# Altium PCB machin.PcbDoc
Units mil, origin at the board's own origin, x right, y up, seen from the top; angles counter-clockwise.
Board outline 6000 x 4000 mil, 2 copper layers (Top Layer, Bottom Layer); 33 components, 42 nets, 316 pads, 11 vias.
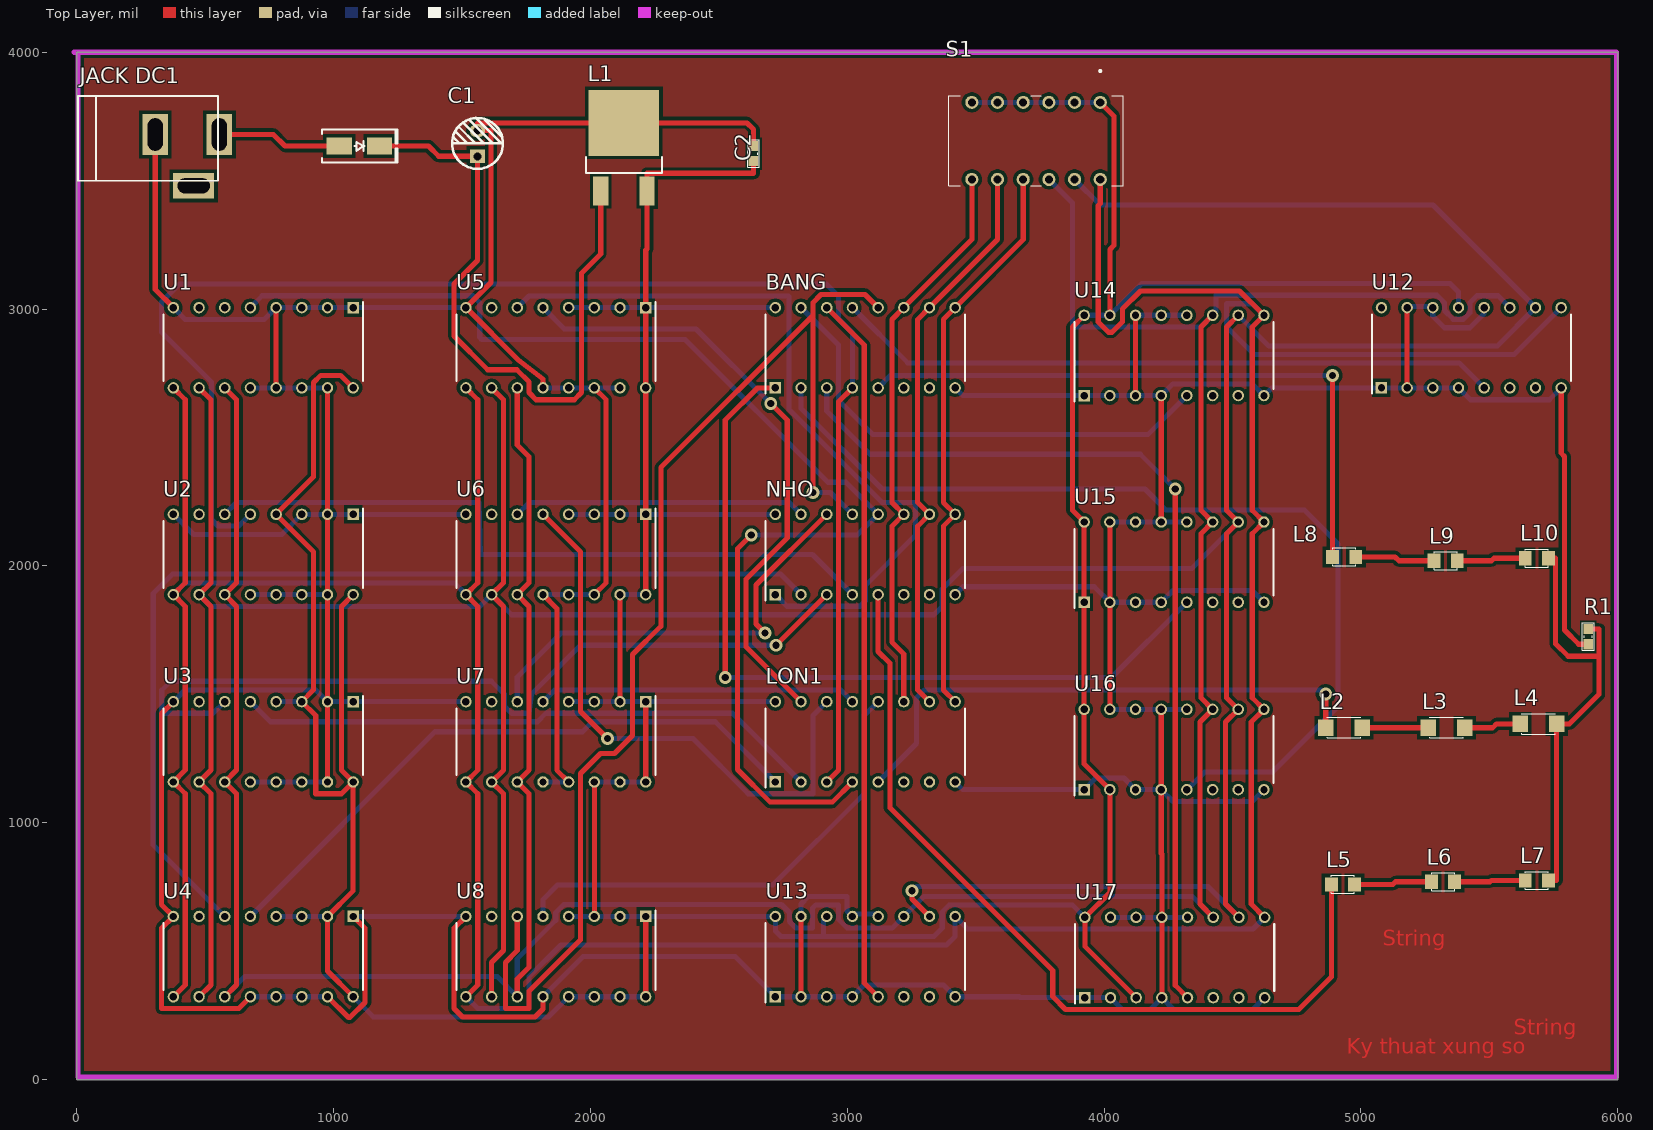
[diagram p0: Top Layer view]
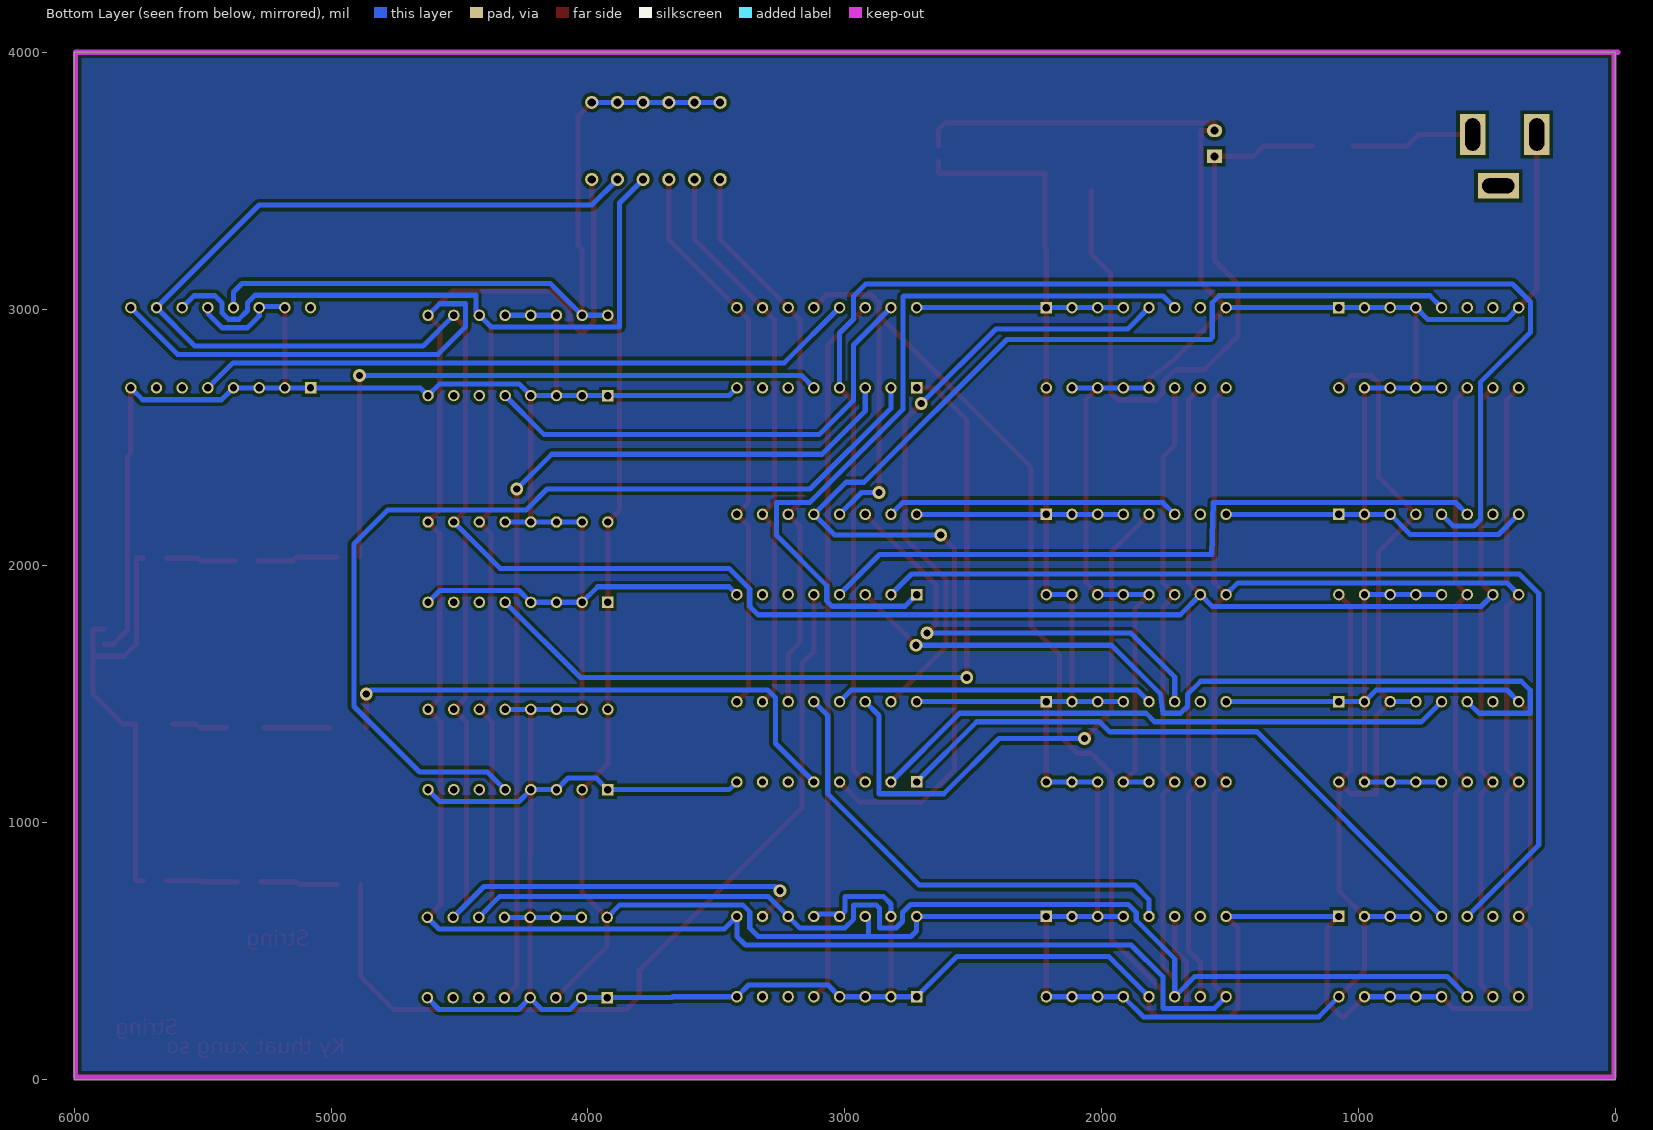
[diagram p1: Bottom Layer view, seen from below]
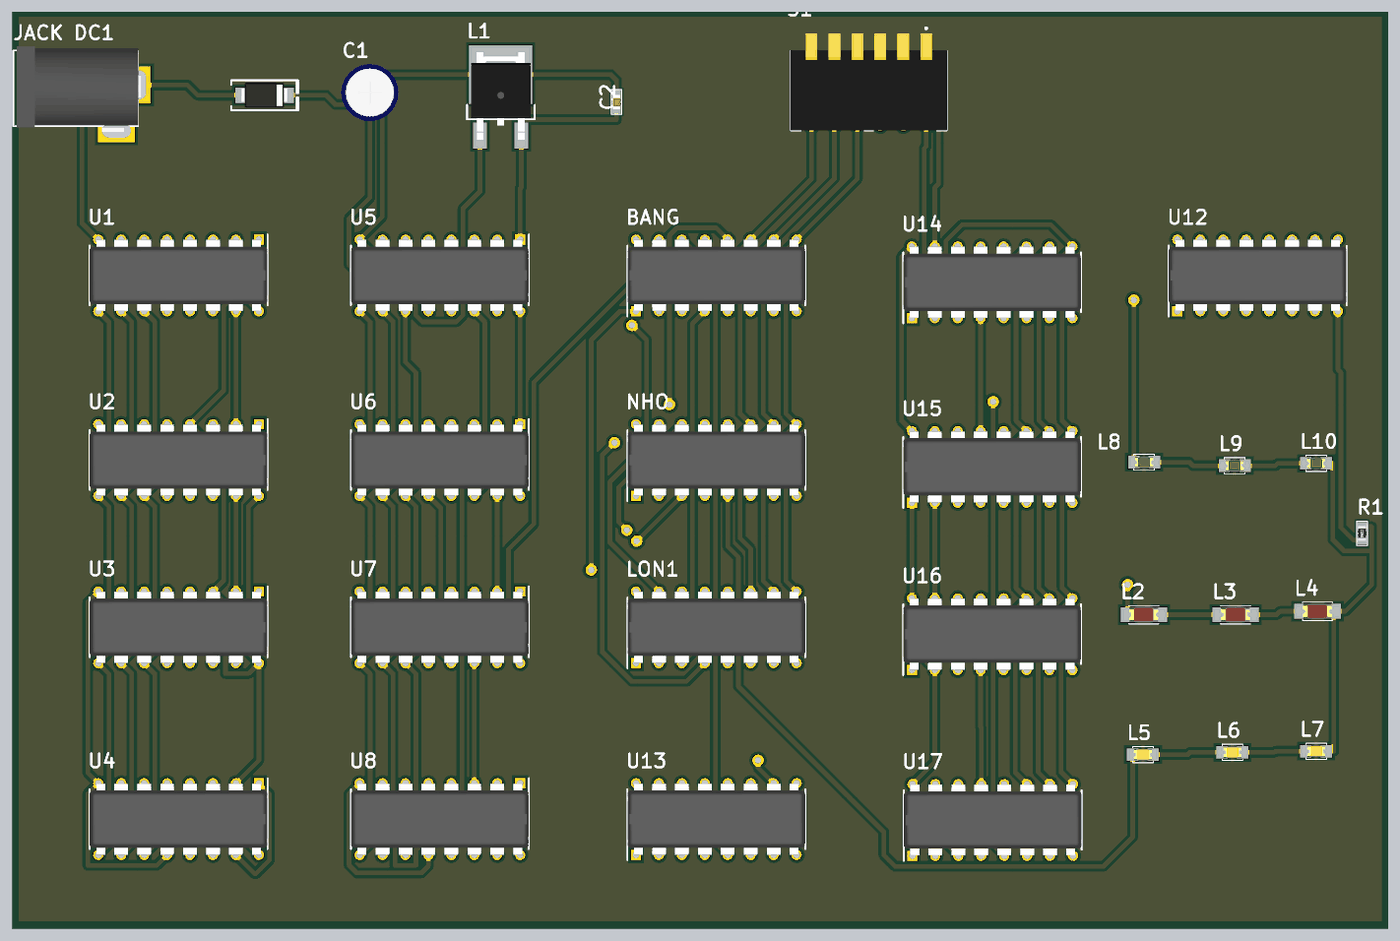
[diagram p2: 3D render of the assembled board from above, using the file's embedded part models]

## Layer stack, top to bottom
Top Solder: solder mask 0.4, Solder Resist, Dk 3.5
Top Layer: signal copper 1.4
Dielectric 1: dielectric 12.6, FR-4, Dk 4.8
Bottom Layer: signal copper 1.4
Bottom Solder: solder mask 0.4, Solder Resist, Dk 3.5

## Board outline
0,0 6000,0 6000,4000 0,4000

## Design rules (kind name [scope] priority, off if disabled: settings)
Clearance [All] p1: gap=13 ignorepadtopadclearanceinfootprint=FALSE
PolygonConnect [All] p1: connectstyle=Direct reliefconductorwidth=10 reliefentries=4 polygonreliefangle="90 Angle" airgapwidth=10
RoutingVias [All] p1: holewidth=28 width=50 viastyle="Through Hole" minholewidth=28 minwidth=50 maxholewidth=28 maxwidth=50
SolderMaskExpansion [All] p1: expansion=4 istentingtop=FALSE
Width [All] p1: maxlimit=40 minlimit=13 preferedwidth=20
30 further rules are at their usual default settings.

## Classes and differential pairs
component class Main_logiv: BANG LON1 NHO U1 U2 U3 U4 U5 U6 U7 U8 U12 U13 U14 U15 U16 U17

## Components (designator, comment, footprint, x,y, rotation, side; value= is the part's Value field where it differs from the comment)
BANG "SN74HC151N" DIP794W53P254L1930H508Q16N 3070,2849.53 r90 top
C1 "0.33uF" "tu hoa 5mm" 1560,3645 r90 top
C2 "101" "tu 0603" 2635,3605.47 r90 top
"JACK DC1" "JACK DC 5.5" "JACK DC 5.5" 430,3580 r0 top value="Jac DC"
L1 "L7805CDT-TR" DPAK_118_446_112X59_SMD 2125,3617.64 r90 top
L2 "LED 0805" LED-1206-Red 4863,1370 r0 top
L3 "LED 0805" LED-1206-Red 5263,1370 r0 top
L4 "LED 0805" LED-1206-Red 5620,1385 r0 top
L5 "LED 0805" LED-0805-Yellow 4885,760 r0 top
L6 "LED 0805" LED-0805-Yellow 5275,770 r0 top
L7 "LED 0805" LED-0805-Yellow 5640,775 r0 top
L8 "LED 0805" LED-0805-Green 4890,2035 r0 top
L9 "LED 0805" LED-0805-Green 5285,2020 r0 top
L10 "LED 0805" LED-0805-Green 5640,2030 r0 top
LON1 "SN74HC151N" DIP794W53P254L1930H508Q16N 3070,1315 r90 top
NHO "SN74HC151N" DIP794W53P254L1930H508Q16N 3070,2044.53 r90 top
R1 "10k" "tro smd 0603" 5885,1724.53 r90 top
S1 "A6DR-6100" A6DR6100 3985,3805 r180 top
U1 "SN74HC151N" DIP794W53P254L1930H508Q16N 725.87,2849.53 r270 top
U2 "SN74HC151N" DIP794W53P254L1930H508Q16N 725.87,2044.53 r270 top
U3 "SN74HC151N" DIP794W53P254L1930H508Q16N 725.87,1315 r270 top
U4 "SN74HC151N" DIP794W53P254L1930H508Q16N 725.87,478.7 r270 top
U5 "SN74HC151N" DIP794W53P254L1930H508Q16N 1865,2849.53 r270 top
U6 "SN74HC151N" DIP794W53P254L1930H508Q16N 1865,2044.53 r270 top
U7 "SN74HC151N" DIP794W53P254L1930H508Q16N 1865,1315 r270 top
U8 "SN74HC151N" DIP794W53P254L1930H508Q16N 1865,478.7 r270 top
U12 "SN74HC151N" DIP794W53P254L1930H508Q16N 5430,2849.53 r90 top
U13 "SN74HC151N" DIP794W53P254L1930H508Q16N 3070,478.7 r90 top
U14 "SN74HC151N" DIP794W53P254L1930H508Q16N 4272.46,2819.53 r90 top
U15 "SN74HC151N" DIP794W53P254L1930H508Q16N 4272.46,2014.53 r90 top
U16 "SN74HC151N" DIP794W53P254L1930H508Q16N 4272.46,1285 r90 top
U17 "SN74HC151N" DIP794W53P254L1930H508Q16N 4275,475 r90 top
? "M7" "DIODE SMA" 1100,3635 r0 top

## Footprints (in the part's own frame and the unit in brackets; to place one, negate y for a bottom-side part, rotate by r counter-clockwise, add the part's x,y. Pads: shape width x height; smd on the part's side, far side on the other; paste and mask are expansions set on the pad)
A6DR6100 [mm]
  round 1.3 hole 0.8: A1(0,0) A2(2.54,0) A3(5.08,0) A4(7.62,0) A5(10.16,0) A6(12.7,0) B1(0,7.62) B2(2.54,7.62) B3(5.08,7.62) B4(7.62,7.62) B5(10.16,7.62) B6(12.7,7.62)
  silkscreen extent -2.3,-3.2 15,8.26, body extent -2.3,-2.52 15,8.23, height 7.52
"DIODE SMA" [mm] "SMA"
  rect 2.5x1.7 smd: 1(-2,0) 2(2,0)
  silkscreen extent -3.68,-1.65 3.75,1.65, body extent -2.6,-1.37 2.6,1.37, height 2.4
DIP794W53P254L1930H508Q16N [mm]
  rect 1.13x1.13 hole 0.73: 1(-3.97,8.89)
  round 1.13 hole 0.73: 2(-3.97,6.35) 3(-3.97,3.81) 4(-3.97,1.27) 5(-3.97,-1.27) 6(-3.97,-3.81) 7(-3.97,-6.35) 8(-3.97,-8.89) 9(3.97,-8.89) 10(3.97,-6.35) 11(3.97,-3.81) 12(3.97,-1.27) 13(3.97,1.27) 14(3.97,3.81) 15(3.97,6.35) 16(3.97,8.89)
  silkscreen extent -4.54,-9.84 3.3,9.84, body extent -3.94,-9.84 3.94,9.84, height 5.09
DPAK_118_446_112X59_SMD [mm] "CASE: DPAK"
  rect 2.85x1.5 smd: 1(-4.023,2.163) 3(-4.023,-2.417)
  rect 6.5x7 smd: 2(2.727,-0.127)
  silkscreen extent -2.22,-3.9 -0.62,3.6, body extent -4.47,-3.43 5.23,3.15, height 2.3
"JACK DC 5.5" [mil] "Jac DC input"
  rect 100x160 hole 59.06 slot 125.98 at 90 deg: 1(125,100) 2(-125,100)
  rect 160x100 hole 59.06 slot 125.98 at 0 deg: 3(25,-100)
  silkscreen extent -425,-80 120,250, body extent -410,-105 134,269, height 434
LED-0805-Green [mil]
  rect 50x55 smd: 1(0,0) 2(90,0)
  silkscreen extent 0,-35 90,35, body extent 5,-25 85,25, height 43
LED-0805-Yellow [mil]
  rect 50x55 smd: 1(0,0) 2(90,0)
  silkscreen extent 0,-35 90,35, body extent 5,-25 85,25, height 43
LED-1206-Red [mil]
  rect 60x65 smd: 1(0,0) 2(142,0)
  silkscreen extent 6,-40 136,40, body extent 7,-31 133,32, height 43
"tro smd 0603" [mm] "Chip Capacitor, 2-Leads, Body 1,60x0,80mm, IPC Medium Density"
  rect 1x0.95 smd mask+0.076: 1(-0.75,0) 2(0.75,0)
  silkscreen extent -1.35,-0.58 1.37,0.58, body extent -0.82,-0.42 0.82,0.43, height 0.44
"tu 0603" [mm] "Chip Capacitor, 2-Leads, Body 1,60x0,80mm, IPC Medium Density"
  rect 1x0.95 smd mask+0.076: 1(-0.75,0) 2(0.75,0)
  silkscreen extent -1.35,-0.58 1.37,0.58, body extent -0.8,-0.4 0.8,0.4, height 0.9
"tu hoa 5mm" [mm]
  rect 1.3x1.5 hole 0.8: 1(-1.27,0)
  oval 1.3x1.5 hole 0.8: 2(1.27,0)
  silkscreen extent -2.51,-2.51 2.51,2.51, body extent -3.12,-3.18 3.23,3.18, height 14.55

## Part data
BANG LON1 NHO U1 U2 U3 U4 U5 U6 U7 U8 U12 U13 U14 U15 U16 U17: "Integrated Circuit", Manufacturer_Name="Texas Instruments", Mouser Part Number=595-SN74HC151N, Datasheet Link=https://www.ti.com/lit/gpn/SN74HC151, Height=5.08mm, Manufacturer_Part_Number=SN74HC151N, Mouser Price/Stock=https://www.mouser.co.uk/ProductDetail/Texas-Instruments/SN74HC151N?qs=st7IWvlL5%2FgZ0EYsqHF4AQ%3D%3D
C1: library part "Tu Hoa 0.33uF 50V 5x11", "Cắm", Chung_Loai=Cắm, Don_Vi=Con, Ma_Hang=MH004655, So_Chan=2, Ten_Linh_Kien="Tụ Hóa 0.33uF 50V 5x11MM"
C2: library part "Tu 0603 101 50V 10%", "Dán", Chung_Loai=Dán, Don_Vi=Con, Ma_Hang=MH004565, So_Chan=2, Ten_Linh_Kien="Tụ 0603 101-0.1nF 10% 50V"
L1: library part REG_35V_5V-1.5A-7.5W-DPAK, "Linear Voltage Regulator IC 1 Output 1.5A DPAK", Alternate Part Number-1="CJ7805 3%", Case/Package=DPAK, Manufacturer=Diodes, Manufacturer Part Number=L7805CDT-TR, Supplier Part Number-1=L7805CDT-TR, Supplier-1="SP ROAD"
L2 L3 L4: library part "LED 1206 Do", "Dán", Chung_Loai=Dán, Don_Vi=Con, Ma_Hang=MH002334, Ten_Linh_Kien="LED1206 Màu Đỏ (Red)"
L5 L6 L7: library part "LED 0805 Vang", "Dán", Chung_Loai=Dán, Don_Vi=Con, Ma_Hang=MH002329, Ten_Linh_Kien="LED 0805 Màu Vàng ( Yellow)"
L8 L9 L10: library part "LED 0805 Xanh La", "Dán", Chung_Loai=Dán, Don_Vi=Con, Ma_Hang=MH002326, Ten_Linh_Kien="LED 0805 Màu Xanh Lá (Green)"
R1: library part "Tro 0603 5% 10k", "Dán", Chung_Loai=Dán, Don_Vi=Con, Ma_Hang=MH006316, So_Chan=2, Ten_Linh_Kien="Trở 0603 5% 10k"
S1: "Switch", Manufacturer_Name="OMRON Electronics", Mouser Part Number=653-A6DR-6100, Datasheet Link=https://componentsearchengine.com/Datasheets/2/A6DR-6100.pdf, Height=7.4mm, Manufacturer_Part_Number=A6DR-6100, Mouser Price/Stock=https://www.mouser.co.uk/ProductDetail/Omron-Electronics/A6DR-6100?qs=Pjd0UV7BHP9H24KYn64LLg%3D%3D
?: library part "Diode M7 ( 4007 )", "Dán", Chung_Loai=Dán, Don_Vi=Con, Ma_Hang=MH000944, Ten_Linh_Kien="Diode M7 1N4007 SMD 1A 1000V"

## Via types
v1: diameter 50, hole 28, Top Layer to Bottom Layer, 11 vias

## Nets (pads, with @x,y where several pads share a name; then routed paths per layer and width w, separated by ;. In a path a pad name is that pad's centre, name@x,y a point inside that pad or via, vN(x,y) a via of type N, cw(c..) or ccw(c..) an arc to the next point about the centre after c; other vN are vias at no path point)
A0: S1.B1 U1.9 U2.9 U3.9 U4.9 U5.9 U6.9 U7.9 U8.9 U12.9 U13.9 U14.9 U15.9 U16.9 U17.9 | length 15075.5
  Top Layer w20: U4.9 422,368.54 422,1112.57 U3.9 422,1204.83 422,1842.1 U2.9 422,1934.36 422,2647.1 U1.9 ; U8.9 1561,368.4 1561,1112.7 U7.9 1561,1204.7 1561,1842.23 U6.9 1561,1934.23 1561,2647.23 U5.9 ; S1.B1 3985,3412 3977,3404 3977,2950 4017,2910 4031,2910 4071,2950 4071,3000 4142,3071 4527.29,3071 U14.9 4577,2930.37 4577,2216.29 U15.9 4577,2125.37 4577,1486.76 U16.9 4573,1391.84 4573,683.3 U17.9
  Bottom Layer w20: U2.9 421.64,1934 1469.23,1934 U6.9 ; U8.9 1560.25,277.16 1760,277.16 1761,278.16 1761,400 1884.75,523.75 3386.75,523.75 3420,557 U13.9 3469,586 4579.7,586 U17.9 ; U14.9 4577.22,3021.08 4477,3021.08 4477,2931 4584.21,2823.79 5597.96,2823.79 U12.9
A1: S1.B2 U1.10 U2.10 U3.10 U4.10 U5.10 U6.10 U7.10 U8.10 U12.10 U13.10 U14.10 U15.10 U16.10 U17.10 | length 16467.7
  Top Layer w20: U4.10 522,368.54 522,1112.57 U3.10 522,1204.83 522,1842.1 U2.10 522,1934.36 522,2647.1 U1.10 ; U8.10 1615,456 1661,502 1661,1112.7 U7.10 1661,1204.7 1661,1842.23 U6.10 1661,1934.23 1661,2647.23 U5.10 ; v1(3252,735) 3252,703 U13.10 ; U14.10 4477,2930.37 4477,2216.29 U15.10 4477,2125.37 4477,1486.76 U16.10 4473,1391.84 4473,683.3 U17.10
  Bottom Layer w20: U2.10 522.1,1842 1568.77,1842 U6.10 1693.25,1809.98 3337.98,1809.98 3370,1842 3370,1910 3450,1990 4341.63,1990 U15.10 ; v1(3252,735) 3269,752 4404.3,752 U17.10 ; S1.B2 3985,3405 5280.83,3405 U12.10 5530.96,2856.79 4641.51,2856.79 U14.10
A2: S1.B3 U1.11 U2.11 U3.11 U4.11 U5.11 U6.11 U7.11 U8.11 U12.11 U13.11 U14.11 U15.11 U16.11 U17.11 | length 14437.3
  Top Layer w20: U4.11 622,368.54 622,1112.57 U3.11 622,1204.83 622,1842.1 U2.11 622,1934.36 622,2647.1 U1.11 ; U8.11 1715,390.99 1761,436.99 1761,1112.7 U7.11 1761,1204.7 1761,1842.23 U6.11 1761,1934.23 1761,2425 1715,2471 U5.11 ; U14.11 4377,2930.37 4377,2216.29 U15.11 4377,2125.37 4377,1486.76 U16.11 4373,1391.84 4373,683.3 U17.11
  Bottom Layer w20: U4.11 654.11,400.65 1636.75,400.65 U8.11 1715,470 1865,620 1865,650 1896,681 2743.75,681 2774.75,650 2774.75,615 2800,589.75 2865.25,589.75 2865.25,668 2877.49,680.25 2965.25,680.25 2965.25,624.51 3000,589.75 3174.75,589.75 U13.11 3298.25,713.25 4343.05,713.25 U17.11 ; S1.B3 3877,3413 3877,2930 4376.63,2930 U14.11 4436.22,2989.59 4436.22,3054.08 5295.92,3054.08 5325.25,3024.75 5325.25,2995 5359.66,2960.58 5400,2960.58 5425.25,2985.83 5425.25,3025 5452.25,3052 5533.83,3052 U12.11
B0-L1: BANG.4 LON1.3 U2.5 | length 5748.1
  Top Layer w20: LON1.3 2966,1204.7 2966,2639.23 BANG.4
  Bottom Layer w20: U2.5 630.62,2155.58 550,2155.58 525,2180.58 525,2715 330,2910 330,3028 400,3098 2918,3098 2966,3050 2966,2961 3020,2907 BANG.4
B1: BANG.3 U17.5 | length 3573.3
  Top Layer w20: v1(4277,2299) 4277,366.7 U17.5
  Bottom Layer w20: BANG.3 2920,2603 3088,2435 4141,2435 v1(4277,2299)
B2: BANG.2 U16.5 | length 3744.8
  Bottom Layer w20: BANG.2 2820,2614 3135,2299 4159,2299 4241,2217 4780,2217 4911,2086 4911,1453 4656,1198 4391.76,1198 U16.5
B3: BANG.1 U15.5 | length 3168.9
  Top Layer w20: v1(2525,1565) 2525,2568.23 2650,2693.23 BANG.1
  Bottom Layer w20: v1(2525,1565) 4029.23,1565 U15.5
B4: BANG.15 U14.5 | length 1896.3
  Bottom Layer w20: BANG.15 2966,2859.83 2966,2645 3100,2511 4170.23,2511 U14.5
B5: BANG.14 U13.5 | length 2766.3
  Top Layer w20: BANG.14 3066,2859.83 3066,376.4 U13.5
B6: BANG.13 U12.5 | length 2589.5
  Bottom Layer w20: BANG.13 3235.04,2790.79 5382.44,2790.79 U12.5
C0: BANG.9 LON1.9 NHO.9 S1.B4 | length 2219.7
  Top Layer w20: LON1.9 3374,1517.3 3374,2154.83 NHO.9 3374,2246.83 3374,2959.83 BANG.9 3685,3270.83 S1.B4
C1: BANG.10 LON1.10 NHO.10 S1.B5 | length 2219.7
  Top Layer w20: LON1.10 3274,1517.3 3274,2154.83 NHO.10 3274,2246.83 3274,2959.83 BANG.10 3585,3270.83 S1.B5
C2: BANG.11 LON1.11 NHO.11 S1.B6 | length 2219.7
  Top Layer w20: LON1.11 3220,1657 3174,1703 3174,2154.83 NHO.11 3174,2246.83 3174,2959.83 BANG.11 3485,3270.83 S1.B6
GND: "JACK DC1.2" BANG.8 C1.2 C2.2 L1.2 LON1.8 NHO.8 R1.1 U1.1 U1.2 U1.3 U1.4 U1.8 U1.12 U1.13 U1.14 U1.15 U2.1 U2.2 U2.3 U2.8 U2.12 U2.13 U2.14 U2.15 U3.1 U3.2 U3.8 U3.12 U3.13 U3.14 U3.15 U4.1 U4.8 U4.12 U4.13 U4.14 U4.15 U5.8 U5.12 U5.13 U5.14 U5.15 U6.8 U6.12 U6.13 U6.14 U7.8 U7.12 U7.13 U8.8 U8.12 U12.1 U12.2 U12.3 U12.4 U12.8 U12.12 U12.14 U12.15 U13.1 U13.2 U13.3 U13.4 U13.8 U13.12 U13.13 U13.15 U14.1 U14.2 U14.3 U14.4 U14.8 U14.12 U14.13 U14.14 U15.2 U15.3 U15.4 U15.8 U15.12 U15.13 U15.14 U15.15 U16.1 U16.3 U16.4 U16.8 U16.12 U16.13 U16.14 U16.15 U17.1 U17.2 U17.4 U17.8 U17.12 U17.13 U17.14 U17.15 | length 29707.9
  Top Layer w20: 305,3680 305,3076.7 U1.8 ; U3.8 330,1425.43 330,680.87 U4.8 330,589.13 330,277 630.46,277 U4.12 ; U1.13 U1.4 ; U4.15 1057.27,241 1063,241 1122,300 1122,588.87 U4.1 ; U3.15 U3.2 U2.15 U2.2 U1.15 ; U8.8 1469,589 1469,277 1502,244 1784,244 1815,275 U8.12 ; U6.12 1869,1834.23 1869,1204.7 U7.13 ; U5.12 1815,2728.25 1719.05,2801.78 U5.8 1613,3103.83 1613,3695 C1.2 1560,3725 L1.2 2610,3725 2635,3700 C2.2 ; U6.14 2061,1934.23 2061,2647.23 U5.14 ; U13.2 U13.15 ; U16.15 U15.2 U15.15 ; U14.3 U14.14 ; U16.13 U16.4 4222.46,880.54 4225,878 U17.13 U17.4 ; U15.13 U14.4 ; U12.2 U12.15 ; U12.8 5780,2439 5793,2426 5793,1750 5848,1695 R1.1
  Bottom Layer w20: U3.8 421.57,1517 930.17,1517 U3.2 U3.1 U7.8 ; U2.8 454.11,2122.58 797.62,2122.58 U2.3 U2.2 U2.1 U6.8 ; U1.8 421.7,2960 730.04,2960 U1.4 U1.3 U1.2 U1.1 U5.8 ; U4.12 U4.13 U4.14 U4.15 ; U3.12 U3.13 U3.14 U3.15 ; U2.12 U2.13 U2.14 U2.15 ; U1.12 U1.13 U1.14 U1.15 ; U4.1 U8.8 ; U8.12 1971.6,479 2563.4,479 U13.1 U13.2 U13.3 U13.4 3065.6,368 3374.4,368 U13.8 3670,322.4 3673.7,318.7 U17.1 U17.2 4070.7,273 4179.3,273 U17.4 4270.7,273 4579.3,273 U17.8 ; U7.12 U7.13 ; U6.12 U6.13 U6.14 ; U5.12 U5.13 U5.14 U5.15 ; U13.15 2820,683.25 2850,713.25 2998.25,713.25 2998.25,656.75 U13.13 3030,645 3110,645 U13.12 ; LON1.8 3450,1128.7 U16.1 3967.76,1174 4077.16,1174 U16.3 U16.4 4268.16,1083 4576.76,1083 U16.8 ; NHO.8 3450.77,1919 3961.69,1919 U15.2 U15.3 U15.4 4268.23,1904 4576.69,1904 U15.8 ; BANG.8 3450,2663.23 U14.1 U14.2 U14.3 U14.4 4268.23,2709 4576.69,2709 U14.8 4652.46,2693.23 U12.1 U12.2 U12.3 U12.4 5426.23,2647 5733.77,2647 U12.8 ; U16.15 U16.14 U16.13 U16.12 ; U15.15 U15.14 U15.13 U15.12 ; U17.15 U17.14 U17.13 U17.12 ; U14.14 U14.13 U14.12 ; U12.15 5184.31,3010.14 5275.69,3010.14 U12.14 5280,2972.58 5325,2927.58 5425,2927.58 5480,2982.58 U12.12
L2: LON1.2 U3.5 | length 2300.9
  Bottom Layer w20: U3.5 754.11,1393.05 1793.25,1393.05 1826.19,1426 2552.7,1426 LON1.2
L3: LON1.1 U4.5 | length 2455.2
  Bottom Layer w20: U4.5 1394.87,1354 1969,1354 2008,1393 2485.7,1393 LON1.1
L4: LON1.15 U5.5 | length 2384
  Top Layer w20: v1(2702,2632) 2766,2568 2766,2108.19 2606,1948.19 2606,1685.3 LON1.15
  Bottom Layer w20: U5.5 1897.83,2923 2411,2923 v1(2702,2632)
L5: LON1.14 U6.5 | length 2246.5
  Top Layer w20: U6.5 1961,2054.83 1961,1433 v1(2066,1328)
  Bottom Layer w20: v1(2066,1328) 2399,1328 2614,1113 2866,1113 2866,1417.3 LON1.14
L6: LON1.13 U7.5 | length 1242.9
  Bottom Layer w20: U7.5 1860.7,1517 2974.3,1517 LON1.13
L7: LON1.12 U8.5 | length 1867.7
  Bottom Layer w20: U8.5 1815,700 1872,757 2710,757 3066,1113 3066,1417.3 LON1.12
LED1: L2.1 LON1.5 | length 2133.5
  Top Layer w20: L2.1 v1(4863,1501)
  Bottom Layer w20: LON1.5 3270,1308.7 3270,1487 3300,1517 4847,1517 v1(4863,1501)
LED2: L5.1 NHO.5 | length 3365.2
  Top Layer w20: NHO.5 3120,1667 3166,1621 3166,1058 3800,424 3800,323 3850,273 4758,273 4885,400 L5.1
LED3: BANG.5 L8.1 | length 2497.2
  Top Layer w20: L8.1 v1(4890,2742)
  Bottom Layer w20: BANG.5 3168.77,2742 v1(4890,2742)
N0: NHO.4 U2.6 | length 2724.9
  Bottom Layer w20: U2.6 622.04,2247 1565,2247 1571,2044 2864.23,2044 NHO.4
N1: NHO.3 U3.6 | length 3262.7
  Top Layer w20: v1(2722.77,1691) NHO.3
  Bottom Layer w20: U3.6 530.62,1426.05 330.62,1426.05 330.62,1516 365.62,1551 1614,1551 1665,1500 1665,1453 1691.95,1426.05 1760,1426.05 1769.75,1500 1960.75,1691 v1(2722.77,1691)
N2: NHO.2 U4.6 | length 3959.5
  Bottom Layer w20: U4.6 297.62,913.25 297.62,1892.62 373,1968 2740.23,1968 NHO.2
N3: NHO.1 U5.6 | length 3001.6
  Bottom Layer w20: U5.6 1760.25,3051.08 2770,3051.08 2773,3048.08 2773,2610 3136,2247 3266,2247 3266,2119 3070,1923 3070,1863 3049.98,1842.98 2765.25,1842.98 NHO.1
N4: NHO.15 U6.6 | length 1143.2
  Bottom Layer w20: U6.6 1761.17,2247 2773.83,2247 NHO.15
N5: NHO.14 U7.6 | length 1722.8
  Top Layer w20: v1(2680,1739) 2644.81,1774.19 2644.81,1925.64 NHO.14
  Bottom Layer w20: U7.6 1715,1567.85 1886.15,1739 v1(2680,1739)
N6-B7: BANG.12 NHO.13 U8.6 | length 4873.7
  Top Layer w20: U8.6 1715,502 1669,456 1669,277 1761,277 1761,344 1961,544 1961,1192 2038.8,1269.8 2094,1269.8 2164,1339.8 2164,1655 2274,1765 2274,2383 2866,2975 ; v1(2866,2286.29) 2866,2975 ; BANG.12 3068.83,3057 2898,3057 2866,3025 2866,2975
  Bottom Layer w20: v1(2866,2286.29) 2934.54,2286.29 NHO.13
N7-L0: LON1.4 NHO.12 U1.5 | length 4890.1
  Top Layer w20: v1(2625.98,2120) 2573,2067.02 2573,1207 2700,1080 2941.3,1080 LON1.4
  Bottom Layer w20: U1.5 722.04,3052 1542,3052 1569,3025 1569,2889 1576,2882 2368.12,2882 2924.39,2325.73 2995.1,2325.73 NHO.12 3039.17,2120 v1(2625.98,2120)
Net_1: "JACK DC1.1" ?.1 | length 484.9
  Top Layer w20: 555,3680 765,3680 810,3635 ?.1
Net_2: ?.2 C1.1 L1.1 | length 2585.6
  Top Layer w20: ?.2 1369,3635 1409,3595 C1.1 1560,3189 1469,3098 1469,2895 1600,2764 1713,2764 1760.25,2716.75 1760.25,2675 1788.25,2647 1937,2647 1965,2675 1965,3140 2039.84,3214.84 L1.1
NetL2_2: L2.2 L3.1 | length 258
  Top Layer w20: L2.2 L3.1
NetL3_2: L3.2 L4.1 | length 221.2
  Top Layer w20: L3.2 5513,1370 5528,1385 L4.1
NetL5_2: L5.2 L6.1 | length 304.1
  Top Layer w20: L5.2 5125,760 5135,770 L6.1
NetL6_2: L6.2 L7.1 | length 277.1
  Top Layer w20: L6.2 5503,770 5508,775 L7.1
NetL8_2: L8.2 L9.1 | length 311.2
  Top Layer w20: L8.2 5133,2035 5148,2020 L9.1
NetL9_2: L9.2 L10.1 | length 269.1
  Top Layer w20: L9.2 5508,2020 5518,2030 L10.1
Ress: L4.2 L7.2 L10.2 R1.2 | length 1701
  Top Layer w20: L7.2 5762,775 L4.2 5812,1385 5927,1500 5927,1648 ; L10.2 5758,2030 5758,1697 5807,1648 5927,1648 ; R1.2 5927,1754.06 5927,1648
VCC: BANG.16 C2.1 L1.3 LON1.16 NHO.16 S1.A1 S1.A2 S1.A3 S1.A4 S1.A5 S1.A6 U1.16 U2.4 U2.16 U3.3 U3.4 U3.16 U4.2 U4.3 U4.4 U4.16 U5.1 U5.2 U5.3 U5.4 U5.16 U6.1 U6.2 U6.3 U6.4 U6.15 U6.16 U7.1 U7.2 U7.3 U7.4 U7.14 U7.15 U7.16 U8.1 U8.2 U8.3 U8.4 U8.13 U8.14 U8.15 U8.16 U12.13 U13.14 U13.16 U14.15 U14.16 U15.1 U15.16 U16.2 U16.16 U17.3 U17.16 | length 19758.1
  Top Layer w20: U4.16 975.87,422.4 U4.2 1075.87,735 U3.16 ; U2.16 1030,1842.36 1030,1204.57 U3.16 ; U1.16 1027.1,2742 950,2742 922,2714 922,2346.96 U2.4 922,2054.7 922,1517.43 U3.3 930,1417.17 930,1113 1030.17,1113 U3.16 ; U8.3 U7.14 ; U7.2 U6.15 ; U8.16 U8.1 ; U7.16 U7.1 ; U6.16 U6.1 U5.16 U5.1 2215,3229 2220.16,3234.16 L1.3 2220.16,3529 2635,3529 C2.1 ; U14.16 3877,2930.37 3877,2216.29 U15.16 U15.1 U16.16 3922.46,1228.7 U16.2 4022.46,728.76 U17.16 3925,518.7 U17.3 ; S1.A1 4038,3752 4038,3248 4022.46,3232.46 U14.15
  Bottom Layer w20: U4.4 U4.3 U4.2 ; U3.4 U3.3 ; U4.16 1154.11,244.16 1836.75,244.16 U8.13 U8.14 U8.15 U8.16 ; U8.4 U8.3 U8.2 U8.1 U13.16 2720,578.51 2741.75,556.75 2907.75,556.75 ; U7.4 U7.3 U7.2 U7.1 LON1.16 ; U6.4 U6.3 U6.2 U6.1 NHO.16 ; U5.4 U5.3 U5.2 U5.1 BANG.16 ; U7.14 U7.15 U7.16 ; U6.15 U6.16 ; U13.14 2907.75,622.75 2907.75,556.75 ; S1.A6 S1.A5 S1.A4 S1.A3 S1.A2 S1.A1 ; U14.16 U14.15 4146.63,3100 5346.93,3100 5380,3066.93 U12.13 ; U17.16 3876.05,680.25 3397.25,680.25 3370,653 3370,590 3336.75,556.75 2907.75,556.75
"": 
pads on no net: "JACK DC1.3" BANG.6 BANG.7 LON1.6 LON1.7 NHO.6 NHO.7 U1.6 U1.7 U2.7 U3.7 U4.7 U5.7 U6.7 U7.7 U8.7 U12.6 U12.7 U12.16 U13.6 U13.7 U14.6 U14.7 U15.6 U15.7 U16.6 U16.7 U17.6 U17.7

## Polygon pours and split planes (outlines as drawn)
no net on Bottom Layer "NONET_L02_P000" (solid, pour order 0): 0,4000 0,0 6000,0 6000,4000
no net on Top Layer "NONET_L01_P001" (solid, pour order 1): 0,4000 0,0 6000,0 6000,4000

## Keep-outs
Keep-Out Layer:
  lines w20: -10,4000 5995,4000 5995,10 5,10 5,4000 55,4000

## Other copper
Top Layer:
  text "String" at 5085,519.99 h60
  text "String" at 5595,174.99 h60
  text "Ky thuat xung so" at 4945,99.99 h60